# EAGLE board alphanewt_v0.1 (EAGLE 8.2.2)

Size 158.4 x 117.72 mm. Coordinates in mm from the lower left corner, seen from the top.
Outline: 0,0 158.4,0 158.4,117.72 0,117.72 0,0
Copper layers (1*16): Top 0.035mm / dielectric 1.5mm / Bottom 0.035mm
Design rules "default": minimum track width 6mil, minimum drill 0.35mm, track to track 6mil, track to pad 6mil, pad to pad 6mil, via to via 6mil, smd to smd 6mil, copper to edge 40mil, drill to drill 6mil, minimum pad ring 10mil, minimum via ring 8mil, stop-mask expansion 4mil, vias tented up to drill 0mil, thermal gap 10mil
Net classes: 0 default: width 0.305 mm, drill 0.508 mm, clearance 0.508 mm

## Footprints (pad centres in the part's own frame; a part is rotated, then mirrored left to right if it is on the bottom)
1X08-BIG = drill 1.016 pad 1.778 octagon: 1 -8.89,0; 2 -6.35,0; 3 -3.81,0; 4 -1.27,0; 5 1.27,0; 6 3.81,0; 7 6.35,0; 8 8.89,0
2X03 = drill 1.016 octagon: 1 -2.54,-1.27; 2 -2.54,1.27; 3 0,-1.27; 4 0,1.27; 5 2.54,-1.27; 6 2.54,1.27
1X10-BIG = drill 1.016 pad 1.778 octagon: 1 -11.43,0; 2 -8.89,0; 3 -6.35,0; 4 -3.81,0; 5 -1.27,0; 6 1.27,0; 7 3.81,0; 8 6.35,0; 9 8.89,0; 10 11.43,0
1X18-BIG = drill 1.016 pad 1.778: 1 -21.59,0; 2 -19.05,0; 3 -16.51,0; 4 -13.97,0; 5 -11.43,0; 6 -8.89,0; 7 -6.35,0; 8 -3.81,0; 9 -1.27,0; 10 1.27,0; 11 3.81,0; 12 6.35,0; 13 8.89,0; 14 11.43,0; 15 13.97,0; 16 16.51,0; 17 19.05,0; 18 21.59,0
SMD2,54-5,08 = smd 2.54 x 5.08: 1 0,0
1X06-BIG = drill 1.016 pad 1.778 octagon: 1 -6.35,0; 2 -3.81,0; 3 -1.27,0; 4 1.27,0; 5 3.81,0; 6 6.35,0
C0805K = smd 1.1 x 1.4: 1 -1,0; 2 1,0
CT7343 = smd 2.6 x 2.4: + 3.2,0; - -3.2,0
DO201-15 = drill 1.499 long: A 7.62,0; C -7.62,0
ISM300F2 = smd 1.4 x 1.65: BOOT_SEL -8.637,-5.7; GND_A -8.637,-7.6; GND_B 8.637,-7.6; GPIO_01 -8.637,3.8; GPIO_13 8.637,-1.9; GPIO_14 -8.637,-1.9; GPIO_15 8.637,-5.7; ON_OFF -8.637,1.9; PWR_CHK 8.637,1.9; RESET 8.637,3.8; RF_IN -8.637,7.6; RXA 8.637,0; RXB 8.637,-3.8; TIMEMARK 8.637,5.7; TXA -8.637,0; TXB -8.637,-3.8; VBAT -8.637,5.7; VCC 8.637,7.6
1X12-CB = drill 1.016 pad 1.778: 1 -13.97,0; 2 -11.43,0; 3 -8.89,0; 4 -6.35,0; 5 -3.81,0; 6 -1.27,0; 7 1.27,0; 8 3.81,0; 9 6.35,0; 10 8.89,0; 11 11.43,0; 12 13.97,0
L4532P = smd 1.8 x 3.6: 1 -2,0; 2 2,0
SMD1,27-2,54 = smd 1.27 x 2.54: 1 0,0
TO220AV = drill 1.016 long: B -2.54,-2.54; C 0,-2.54; E 2.54,-2.54
R0805 = smd 1.1 x 1.4: 1 -1,0; 2 1,0
1X06-CLEANBIG = drill 1.016 pad 1.778 octagon: 1 -6.35,0; 2 -3.81,0; 3 -1.27,0; 4 1.27,0; 5 3.81,0; 6 6.35,0
TO92 = drill 0.813 octagon: 1 1.27,0; 2 0,1.905; 3 -1.27,0
5566-2 = drill 1.4 square: 1 0,-2.75; 2 0,2.75 | hole 3: 4.7,2.29; -4.7,2.29
F15HP = drill 1.016 octagon: 1 -9.601,-1.27; 2 -6.858,-1.27; 3 -4.115,-1.27; 4 -1.372,-1.27; 5 1.372,-1.27; 6 4.115,-1.27; 7 6.858,-1.27; 8 9.601,-1.27; 9 -8.23,1.27; 10 -5.486,1.27; 11 -2.743,1.27; 12 0,1.27; 13 2.743,1.27; 14 5.486,1.27; 15 8.23,1.27 | drill 3.302 pad 5.08: G1 -16.662,0; G2 16.662,0
MOLEX_480371000 = smd 1.2 x 2: 1 3.5,2.6; 2 1,2.6; 3 -1,2.6; 4 -3.5,2.6 | drill 2.5: M1 -5.7,0; M2 5.7,0 | hole 1.1: -2.25,0; 2.25,0
5566-6 = drill 1.4 square: 1 4.2,-2.75; 2 0,-2.75; 3 -4.2,-2.75; 4 4.2,2.75; 5 0,2.75; 6 -4.2,2.75 | hole 3: 8.9,2.29; -8.9,2.29
5566-4 = drill 1.4 square: 1 2.1,-2.75; 2 -2.1,-2.75; 3 2.1,2.75; 4 -2.1,2.75 | hole 3: 6.8,2.29; -6.8,2.29
5566-10 = drill 1.4 square: 1 8.4,-2.75; 2 4.2,-2.75; 3 0,-2.75; 4 -4.2,-2.75; 5 -8.4,-2.75; 6 8.4,2.75; 7 4.2,2.75; 8 0,2.75; 9 -4.2,2.75; 10 -8.4,2.75 | hole 3: 13.1,2.29; -13.1,2.29

## Placement (x,y rotation side)
ALT  [1X08-BIG]  19.69,10.7 270 top
ARD_1  [1X08-BIG]  39.37,2.54 0 top
ARD_2  [1X08-BIG]  62.23,2.54 0 top
ARD_3  [1X08-BIG]  85.09,2.54 0 top
ARD_4  [2X03]  64.9,27.94 90 top
ARD_5  [1X08-BIG]  77.47,50.8 0 top
ARD_6  [1X08-BIG]  54.61,50.8 0 top
ARD_7  PINHD-1X10  [1X10-BIG]  28.96,50.8 0 top
ARD_8  [1X18-BIG]  97.79,29.21 90 top
ARD_9  [1X18-BIG]  100.33,29.21 90 top
B1_CELL_1  [SMD2,54-5,08]  29.54,80.84 0 bottom
B1_CELL_2  [SMD2,54-5,08]  41.27,59.66 0 bottom
B1_CELL_3  [SMD2,54-5,08]  53.53,59.66 0 bottom
B1_GND  [SMD2,54-5,08]  18.2,65.25 0 bottom
B1_IN_NEG  [SMD2,54-5,08]  34.9,70.69 0 bottom
B1_IN_POS  [SMD2,54-5,08]  48.02,70.44 0 bottom
B1_POS  [SMD2,54-5,08]  65.47,65.08 0 bottom
B1CC  [1X06-BIG]  114.06,83.05 90 top
B2_CELL_1  [SMD2,54-5,08]  29.54,59.54 0 bottom
B2_CELL_2  [SMD2,54-5,08]  41.77,80.34 0 bottom
B2_GND  [SMD2,54-5,08]  18.31,86.32 0 bottom
B2_IN_NEG  [SMD2,54-5,08]  35,91.89 0 bottom
B2_IN_POS  [SMD2,54-5,08]  48.28,91.5 0 bottom
B2_POS  [SMD2,54-5,08]  65.34,86.18 0 bottom
B2CC  [1X06-BIG]  120.96,82.92 90 top
B3_CELL_3  [SMD2,54-5,08]  53.51,80.34 0 bottom
C1  4.7uF  [C0805K]  25.59,26.49 0 top
C2  27pF  [C0805K]  84.2,17.78 90 top
C3  27pF  [C0805K]  87.9,18.4 90 top
C4  27pF  [C0805K]  90.79,12.25 90 top
C5  27pF  [C0805K]  91.98,23 90 top
C6  27pF  [C0805K]  87.81,23.13 90 top
C7  [CT7343]  126,59 270 top
C8  [CT7343]  108,59 270 top
C9  [CT7343]  121,59 270 top
C10  [CT7343]  113,59 270 top
D1  1N5400  [DO201-15]  49.4,10.43 0 top
D2  1N5400  [DO201-15]  49.28,18.03 0 top
GPS1  ISM300F2  [ISM300F2]  119.03,10.59 180 top
GYRO  [1X12-CB]  142.88,15.42 90 bottom
L1  33nH  [L4532P]  118.52,25.26 90 top
LCC  [1X06-BIG]  116.17,36.45 0 top
PEXT1  [SMD1,27-2,54]  133.5,71.41 180 bottom
PEXT2  [SMD1,27-2,54]  138.07,90.59 0 bottom
PEXT3  [SMD1,27-2,54]  133.37,80.72 0 bottom
PEXT4  [SMD1,27-2,54]  137.53,86.09 0 bottom
PEXT5  [SMD1,27-2,54]  133.1,75.59 0 bottom
PEXT6  [SMD1,27-2,54]  137.17,95.59 0 bottom
PEXT7  [SMD1,27-2,54]  137.74,100.09 0 bottom
PO1  [SMD1,27-2,54]  135.38,71.41 180 bottom
PO2  [SMD1,27-2,54]  135.19,75.59 0 bottom
PO3  [SMD1,27-2,54]  135.26,80.59 0 bottom
PO4  [SMD1,27-2,54]  135.34,86.09 0 bottom
PO5  [SMD1,27-2,54]  135.72,90.59 0 bottom
PO6  [SMD1,27-2,54]  135.29,95.59 0 bottom
PO7  [SMD1,27-2,54]  135.86,100.09 0 bottom
PVIN1  [SMD1,27-2,54]  137.31,71.09 0 bottom
PVIN2  [SMD1,27-2,54]  133.38,90.59 0 bottom
PVIN3  [SMD1,27-2,54]  136.95,80.59 0 bottom
PVIN4  [SMD1,27-2,54]  133.43,85.59 0 bottom
PVIN5  [SMD1,27-2,54]  137.41,75.59 0 bottom
PVIN6  [SMD1,27-2,54]  132.98,95.59 0 bottom
PVIN7  [SMD1,27-2,54]  133.55,100.09 0 bottom
Q1  TIP41C  [TO220AV]  82.28,60.94 180 top
Q2  TIP41C  [TO220AV]  94.1,60.94 180 top
Q3  TIP41C  [TO220AV]  83.04,89.66 90 top
Q4  TIP41C  [TO220AV]  76.94,89.89 90 top
Q5  TIP41C  [TO220AV]  76.94,78.57 90 top
Q6  TIP41C  [TO220AV]  88.94,89.37 90 top
Q7  TIP41C  [TO220AV]  88.55,83.06 0 top
R1  150  [R0805]  103.53,95.81 0 top
R2  150  [R0805]  135.01,84.57 0 top
R3  150  [R0805]  135.42,91.09 0 top
R4  150  [R0805]  115.4,70.87 0 top
R5  150  [R0805]  126.9,70.91 0 top
R6  150  [R0805]  128.26,91.17 0 top
R7  150  [R0805]  129.64,77.04 0 top
R8  150  [R0805]  127.01,96.54 0 top
R9  150  [R0805]  96.26,96.08 0 top
R10  120  [R0805]  135.14,77.52 0 top
R11  120  [R0805]  110.66,96.03 0 top
R12  10k  [R0805]  134.39,71.17 0 top
R13  10k  [R0805]  118.52,96.41 0 top
R14  1.7M  [R0805]  107.77,70.29 0 top
R15  470k  [R0805]  128.39,83.88 0 top
R16  120  [R0805]  135.02,96.81 0 top
R17  120  [R0805]  100.28,78.71 0 top
R18  10k  [R0805]  100.02,83.74 0 top
R19  10k  [R0805]  100.52,70.25 0 top
R20  33  [R0805]  83.97,12.02 90 top
R21  33  [R0805]  86.78,12.4 270 top
R22  6800  [R0805]  9.54,32.73 0 top
R23  120000  [R0805]  9.19,42.24 0 top
R24  6800  [R0805]  16.57,32.23 0 top
R25  120000  [R0805]  16.94,41.73 0 top
R26  6800  [R0805]  31.96,41.7 0 top
R27  120000  [R0805]  24.32,41.35 0 top
R28  33  [R0805]  86.58,7.62 90 top
R29  33  [R0805]  83.13,7.25 270 top
R30  6800  [R0805]  32.88,25.67 0 top
R31  120000  [R0805]  32.1,33.08 0 top
R32  6800  [R0805]  40.48,41.34 0 top
R33  120000  [R0805]  72.77,38.48 0 top
R34  4700  [R0805]  91.97,17.97 90 top
R35  6800  [R0805]  24.07,31.54 0 top
R36  120000  [R0805]  40.44,34.92 0 top
R37  6800  [R0805]  100.14,89.74 0 top
R38  120000  [R0805]  40.42,27.21 0 top
RB1  [1X06-CLEANBIG]  43.71,107.41 0 top
RB2  [1X08-BIG]  63.2,107.34 0 top
SACC  [1X06-BIG]  117.17,65.96 0 top
T1  2N3904  [TO92]  84.66,74.55 0 top
T2  2N3904  [TO92]  91.21,75.79 180 top
T3  2N3904  [TO92]  82.66,56.01 0 top
X1  5566-2  [5566-2]  114.5,43 180 bottom
X2  5566-2  [5566-2]  108.26,49.69 0 bottom
X3  5566-2  [5566-2]  122,50 0 bottom
X4  5566-2  [5566-2]  122,29 0 bottom
X5  5566-2  [5566-2]  136.5,53 270 bottom
X6  5566-2  [5566-2]  128.5,45 180 bottom
X7  5566-2  [5566-2]  140,43.5 90 bottom
X9  [F15HP]  59.34,106.19 0 top
X10  [F15HP]  146.91,76.18 270 top
X11  [F15HP]  147.45,36.91 270 top
X12  USB-A  [MOLEX_480371000]  24.2,106.76 180 top
X13  5566-6  [5566-6]  108.38,28.04 270 bottom
X14  5566-6  [5566-6]  134.12,29.7 270 bottom
X15  5566-4  [5566-4]  135,64 0 top
X17  5566-10  [5566-10]  76,24 90 top

## Library data of the parts
ALT ARD_7-ARD_9 B1CC B2CC C7-C10 GYRO LCC RB1 SACC X9-X12 = adafruit
ARD_1-ARD_3 ARD_5 ARD_6 RB2 = adafruit; OC_NEWARK: unknown
ARD_4 = pinhead
B1_CELL_1-B1_CELL_3 B1_GND B1_IN_NEG B1_IN_POS B1_POS B2_CELL_1 B2_CELL_2 B2_GND B2_IN_NEG B2_IN_POS B2_POS B3_CELL_3 PEXT1-PEXT7 PO1-PO7 PVIN1-PVIN7 = wirepad
C1-C6 = adafruit; MPN: C0805C270J5GACTU; OC_NEWARK: 36X2729
D1 D2 = diode
GPS1 = ISM300F2; OC_NEWARK: unknown
L1 = eagle-ltspice; MPN: MCWL06KT33N; OC_NEWARK: 20T1101; SPICEMODEL: NONE; SPICEPREFIX: L
Q1-Q7 = transistor-power
R1-R33 R35-R38 = adafruit; MF: VISHAY/DALE; MPN: CRCW120633R2FKEA; OC_NEWARK: 42K4999
R34 = adafruit; MF: VISHAY/DALE; MPN: CRCW12104K70FKEA; OC_NEWARK: 53K3253
T1-T3 = transistor
X1-X7 = con-molex; OC_FARNELL: 1822072; OC_NEWARK: unknown
X13 X14 = con-molex; MPN: 95566-61002; OC_FARNELL: unknown; OC_NEWARK: 22K8620
X15 X17 = con-molex; OC_FARNELL: unknown; OC_NEWARK: unknown

## Nets
5.0V: X12.1
5V_OUT: RB2.3
+3.3V: ALT.2 ARD_1.4 B1CC.1 B2CC.1 C3.1 GPS1.VCC L1.2 LCC.1 R34.1 SACC.1
+5V: ARD_1.5 ARD_8.1 ARD_9.1 R22.2 R24.2 R26.2 R30.2 R32.2 R35.2 R37.2 RB1.1 RB2.2
A0: ARD_2.1
A1: ARD_2.2
A2: ARD_2.3
A4: ARD_2.5
ALT_CS: ALT.7 ARD_8.7
ALT_MISO: ALT.5 ARD_8.9
ALT_MOSI: ALT.6 ARD_8.8
ALT_SCK: ALT.4 ARD_8.10
ALT_VIN: ALT.1
AREF: ARD_7.3
B1_CHRG_IN: B1_POS.1 B1CC.6 C7.+ C9.+ X13.1
B1_CHRG_OUT: B1CC.5 B2CC.5 X17.1
B1_GND: B1_GND.1 C7.- C9.- X13.6 X17.2
B1_TO_LOAD: D1.A X17.5
B2_CHRG_IN: B2_POS.1 B2CC.6 C8.+ C10.+ X14.1
B2_CHRG_OUT: X17.3
B2_GND: B2_GND.1 C8.- C10.- X14.6 X17.4
B2_TO_LOAD: D2.A X17.7
BATT_1_TS1: ARD_3.1 R30.1 R31.2
BATT_1_TS2: ARD_3.2 R32.1 R33.2
BATT_2_TS1: ARD_3.3 R35.1 R36.2
BATT_2_TS2: ARD_3.4 R37.1 R38.2
BATT_CHRG_PWR: B1_IN_POS.1 B2_IN_POS.1 X15.1
BATT_CHRG_PWR_RTN: B1_IN_NEG.1 B2_IN_NEG.1 X15.2
BATT_EXT_PWR: PEXT1.1 PEXT2.1 PEXT3.1 PEXT4.1 PEXT5.1 PEXT6.1 PEXT7.1 X10.1 X10.3
CAMERA_SWITCH: ARD_7.9
CANRX: ARD_3.7
CANTX: ARD_3.8
CHIP_SEL: ARD_7.8
CTS: RB1.5
CUTDOWN_1_FIRE: ARD_6.5 R1.2
CUTDOWN_2_FIRE: ARD_6.4 R4.2
D2: ARD_6.6
D6: ARD_6.2
D7: ARD_6.1
D22: ARD_8.2
D23: ARD_9.2
D24: ARD_8.3
D25: ARD_9.3
D26: ARD_8.4
D27: ARD_9.4
D29: ARD_9.5
D30: ARD_8.6
D31: ARD_9.6
D33: ARD_9.7
D35: ARD_9.8
D37: ARD_9.9
D39: ARD_9.10
D40: ARD_8.11
D41: ARD_9.11
D42: ARD_8.12
D43: ARD_9.12
D44: ARD_8.13
D45: ARD_9.13
D46: ARD_8.14
D47: ARD_9.14
D48: ARD_8.15
D49: ARD_9.15
D50: ARD_8.16
D51: ARD_9.16
D52: ARD_8.17
D53: ARD_9.17
DAC0: ARD_3.5
DAC1: ARD_3.6
FLT_CMP_TEMP: ARD_2.7 R26.1 R27.2
GND: ALT.3 ARD_1.6 ARD_1.7 ARD_7.4 ARD_8.18 ARD_9.18 B1CC.2 B2CC.2 C1.2 C2.2 C3.2 C4.2 C5.2 C6.2 GPS1.GND_A GPS1.GND_B GYRO.1 LCC.2 Q1.E Q2.E Q3.E Q4.E Q5.E Q6.E Q7.E R3.1 R8.1 R9.1 R12.1 R13.1 R15.1 R18.1 R19.1 R23.1 R25.1 R27.1 R31.1 R33.1 R36.1 R38.1 RB1.6 RB2.1 RB2.8 SACC.2 X9.2 X9.4 X10.2 X10.4 X12.4 X17.6 X17.8 X17.10
GYRO_AD0: GYRO.9
GYRO_CIN: GYRO.8
GYRO_COUT: GYRO.7
GYRO_ESC: GYRO.6
GYRO_ESD: GYRO.5
GYRO_FSYNC: GYRO.10
GYRO_INT: GYRO.11
GYRO_PWR: ARD_8.5
HEATER_1_PWR: PO4.1 X4.1 X11.8
HEATER_1_PWR_RTN: Q4.C X4.2 X11.9
HEATER_2_PWR: PO5.1 X5.1 X11.10
HEATER_2_PWR_RTN: Q5.C X5.2 X11.11
HEATER_CONTROL_1: ARD_7.10 R10.2
HEATER_CONTROL_2: ARD_6.3 R11.2
IOREF: ARD_1.2
LI_ION: RB2.7
LOAD_IN: D1.C D2.C LCC.6
MISO: ARD_4.1 ARD_7.6
MOSI: ARD_4.4 ARD_7.7
N$1: GPS1.RESET R34.2
N$2: GPS1.TXB R21.1
N$3: GPS1.TXA R20.1
N$5: GPS1.RXB R28.2
N$7: GPS1.RXA R29.2
N$9: GYRO.2
N$10: ARD_4.2
N$11: ARD_4.6
N$12: X9.9
N$13: X9.10
N$14: ARD_4.5
N$15: R4.1 R6.2 T2.2
N$16: R1.1 R2.2 T1.2
N$18: Q4.B R10.1 R12.2
N$19: Q2.B R6.1 R8.2 T2.3
N$20: X9.11
N$21: X9.12
N$22: Q5.B R11.1 R13.2
N$23: Q1.B R2.1 R3.2 T1.3
N$24: Q6.B R16.1 R18.2
N$25: X9.13
N$26: R5.1 R7.2 T3.2
N$27: Q3.B R7.1 R9.2 T3.3
N$28: X9.14
N$29: B1_CELL_1.1 X13.5
N$30: X9.15
N$31: Q7.B R17.1 R19.2
N$33: B1_CELL_2.1 X13.4
N$34: B3_CELL_3.1 X14.3
N$35: B2_CELL_2.1 X14.4
N$36: B2_CELL_1.1 X14.5
N$37: B1_CELL_3.1 X13.3
N$40: X9.5
N$41: X9.6
N$42: X9.7
N$43: X9.8
N$47: X10.12
N$48: X10.13
N$49: X10.14
N$50: X10.15
N$55: X10.5
N$72: X11.7
NET_AV: RB2.5
ON_OFF: RB2.6
PYRO_1_PWR: PO1.1 X2.1 X11.1
PYRO_1_PWR_RTN: Q1.C T1.1 X2.2 X11.2
PYRO_2_PWR: PO2.1 X1.1 X11.3
PYRO_2_PWR_RTN: Q2.C T2.1 X1.2 X11.4
RESET: ARD_1.3 X17.9
RF_IN: GPS1.RF_IN L1.1
RI: RB2.4
RX0: ARD_6.8 X12.2
RX1: ARD_5.6 C6.1 R29.1
RX2: ARD_5.4
RX3: ARD_5.2 RB1.2
RXB: C5.1 R28.1
S/A_PWR_IN: SACC.6 X10.6 X10.8 X10.10
S/A_PWR_OUT: SACC.5 X15.3
S/A_PWR_RTN: X10.7 X10.9 X10.11 X15.4
SCK: ARD_4.3 ARD_7.5
SCL: ARD_5.8 B1CC.3 B2CC.3 GYRO.4 LCC.3 SACC.3
SCL1: ARD_7.1
SDA: ARD_5.7 B1CC.4 B2CC.4 GYRO.3 LCC.4 SACC.4
SDA1: ARD_7.2
SPARE_1_PWR: PO6.1 X6.1 X11.12
SPARE_1_PWR_RTN: Q6.C X6.2 X11.13
SPARE_2_PWR: PO7.1 X7.1 X11.14
SPARE_2_PWR_RTN: Q7.C X7.2 X11.15
SPARE_HIGH_1_CONTROL: R5.2
SPARE_HIGH_1_PWR: PO3.1 X3.1 X11.5
SPARE_HIGH_1_PWR_RTN: Q3.C T3.1 X3.2 X11.6
SPARE_LOW_1_CONTROL_1: R16.2
SPARE_LOW_2_CONTROL: R17.2
TEMP_EXT_1: ARD_2.8 R22.1 R23.2 X9.1
TEMP_EXT_2: ARD_2.6 R24.1 R25.2 X9.3
TX0: ARD_6.7 X12.3
TX1: ARD_5.5 C2.1 R20.2
TX2: ARD_5.3
TX3: ARD_5.1 RB1.3
TXB: C4.1 R21.2
UNKNOWN: ARD_1.1
VBAT: GPS1.VBAT
VCC_RB: RB1.4
VIN: ARD_1.8 LCC.5 PVIN1.1 PVIN2.1 PVIN3.1 PVIN4.1 PVIN5.1 PVIN6.1 PVIN7.1 R14.2
VIN_VOLTAGE_TLM: ARD_2.4 C1.1 R14.1 R15.2

## Tracks (layer width: path | path; a pad name or v marks a point on that pad's centre or on a via)
+3.3V  (9 unrouted)
+5V  (11 unrouted)
ALT_CS  (1 unrouted)
ALT_MISO  (1 unrouted)
ALT_MOSI  (1 unrouted)
ALT_SCK  (1 unrouted)
B1_CHRG_IN  (4 unrouted)
B1_CHRG_OUT  (2 unrouted)
B1_GND  (4 unrouted)
B1_TO_LOAD  (1 unrouted)
B2_CHRG_IN  (4 unrouted)
B2_GND  (4 unrouted)
B2_TO_LOAD  (1 unrouted)
BATT_1_TS1  (2 unrouted)
BATT_1_TS2  (2 unrouted)
BATT_2_TS1  (2 unrouted)
BATT_2_TS2  (2 unrouted)
BATT_CHRG_PWR  (2 unrouted)
BATT_CHRG_PWR_RTN  (2 unrouted)
BATT_EXT_PWR  (8 unrouted)
CUTDOWN_1_FIRE  (1 unrouted)
CUTDOWN_2_FIRE  (1 unrouted)
FLT_CMP_TEMP  (2 unrouted)
GND  (51 unrouted)
HEATER_1_PWR  (2 unrouted)
HEATER_1_PWR_RTN  (2 unrouted)
HEATER_2_PWR  (2 unrouted)
HEATER_2_PWR_RTN  (2 unrouted)
HEATER_CONTROL_1  (1 unrouted)
HEATER_CONTROL_2  (1 unrouted)
LOAD_IN  (2 unrouted)
MISO  (1 unrouted)
MOSI  (1 unrouted)
N$1  (1 unrouted)
N$2  (1 unrouted)
N$3  (1 unrouted)
N$5  (1 unrouted)
N$7  (1 unrouted)
N$15  (2 unrouted)
N$16  (2 unrouted)
N$18  (2 unrouted)
N$19  (3 unrouted)
N$22  (2 unrouted)
N$23  (3 unrouted)
N$24  (2 unrouted)
N$26  (2 unrouted)
N$27  (3 unrouted)
N$29  (1 unrouted)
N$31  (2 unrouted)
N$33  (1 unrouted)
N$34  (1 unrouted)
N$35  (1 unrouted)
N$36  (1 unrouted)
N$37  (1 unrouted)
PYRO_1_PWR  (2 unrouted)
PYRO_1_PWR_RTN  (3 unrouted)
PYRO_2_PWR  (2 unrouted)
PYRO_2_PWR_RTN  (3 unrouted)
RESET  (1 unrouted)
RF_IN  (1 unrouted)
RX0  (1 unrouted)
RX1  (2 unrouted)
RX3  (1 unrouted)
RXB  (1 unrouted)
S/A_PWR_IN  (3 unrouted)
S/A_PWR_OUT  (1 unrouted)
S/A_PWR_RTN  (3 unrouted)
SCK  (1 unrouted)
SCL  (5 unrouted)
SDA  (5 unrouted)
SPARE_1_PWR  (2 unrouted)
SPARE_1_PWR_RTN  (2 unrouted)
SPARE_2_PWR  (2 unrouted)
SPARE_2_PWR_RTN  (2 unrouted)
SPARE_HIGH_1_PWR  (2 unrouted)
SPARE_HIGH_1_PWR_RTN  (3 unrouted)
TEMP_EXT_1  (3 unrouted)
TEMP_EXT_2  (3 unrouted)
TX0  (1 unrouted)
TX1  (2 unrouted)
TX3  (1 unrouted)
TXB  (1 unrouted)
VIN  (9 unrouted)
VIN_VOLTAGE_TLM  (3 unrouted)